# Altium PCB PCB2.PcbDoc (part 2 of 2)
Units mil, origin at the board's own origin, x right, y up, seen from the top; angles counter-clockwise.
Board outline 5560 x 2585 mil, 4 copper layers (L1, L2, L3, L4), stack 23.756 mil thick; 155 components, 55 nets, 355 pads, 375 vias.
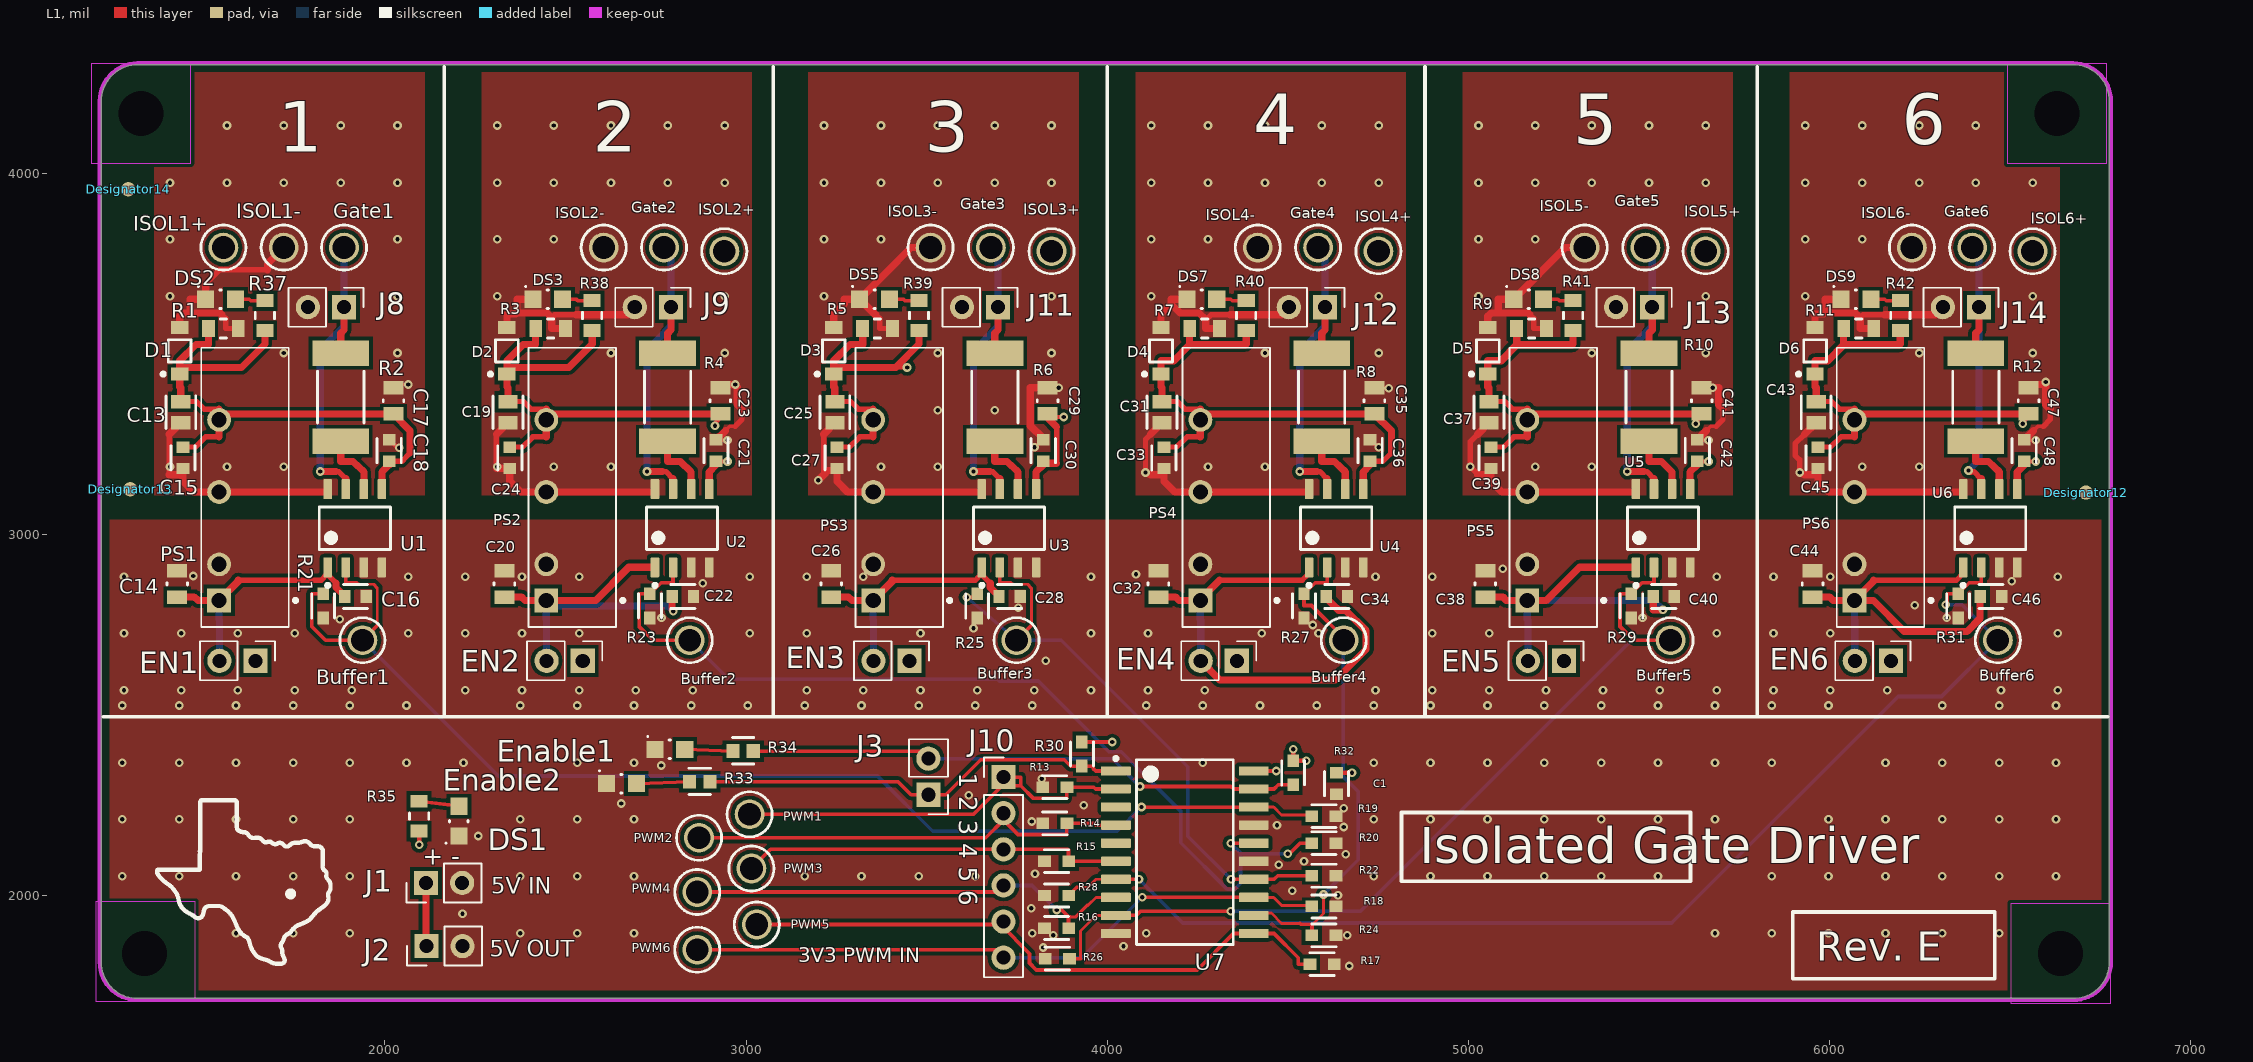
[diagram p0: L1 view]

## Via types
v1: diameter 24, hole 12, L1 to L4, 375 vias

## Nets (pads, with @x,y where several pads share a name; then routed paths per layer and width w, separated by ;. In a path a pad name is that pad's centre, name@x,y a point inside that pad or via, vN(x,y) a via of type N, cw(c..) or ccw(c..) an arc to the next point about the centre after c; other vN are vias at no path point) (continued)
NetC44_1: (continued)
  L1 w15: 6122,2873 6351,2873 U6.1@6370,2892
  L1 w20: C44.1@5953,2827 6000,2827 6010,2817 PS6.1@6069,2817 ; 6122,2873 6122,2870 PS6.1@6069,2817 ; U6.1@6370,2892 U6.1@6370,2909 ; C46.1@6417,2828 6417,2768 6381,2731 6207,2731 6122,2817 PS6.1@6069,2817
  L4 w20: PS6.1@6069,2817 6069,2764 6070,2763 EN6.2
NetDS1_2: DS1.2 R35.2 | length 110.8
  L1 w10: R35.2@2095,2261 DS1.2@2205,2248
NetDS2_2: DS2.2 R37.2 | length 82.7
  L1 w10: DS2.2@1587,3651 1625,3651 1629,3647 R37.2@1668,3647
NetDS3_2: DS3.2 R38.2 | length 84
  L1 w10: DS3.2@2492,3651 2531,3651 2534,3647 R38.2@2574,3647
NetDS4_2: Enable1.2 R34.2 | length 134.1
  L1 w10: Enable1.2@2830,2405 R34.2@2964,2400
NetDS5_2: DS5.2 R39.2 | length 82.7
  L1 w10: DS5.2@3398,3651 3436,3651 3440,3647 R39.2@3479,3647
NetDS6_2: Enable2.2 R33.2 | length 148.1
  L1 w10: Enable2.2@2696,2310 R33.2@2844,2315
NetDS7_2: DS7.2 R40.2 | length 83.7
  L1 w10: DS7.2@4303,3651 4342,3651 4346,3647 R40.2@4385,3647
NetDS8_2: DS8.2 R41.2 | length 82.7
  L1 w10: DS8.2@5209,3651 5248,3651 5252,3647 R41.2@5290,3647
NetDS9_2: DS9.2 R42.2 | length 83.7
  L1 w10: DS9.2@6114,3651 6153,3651 6157,3647 R42.2@6196,3647
NetR2_1: R2.1 U1.6 | length 179.7
  L1 w20: R2.1 1878,3202 1912,3202 1942,3173 U1.6@1942,3125
NetR4_1: R4.1 U2.6 | length 180.7
  L1 w20: R4.1 2783,3202 2818,3202 2848,3173 U2.6@2848,3125
NetR6_1: R6.1 U3.6 | length 179.7
  L1 w20: R6.1 3689,3202 3723,3202 3753,3173 U3.6@3753,3125
NetR8_1: R8.1 U4.6 | length 180.7
  L1 w20: R8.1 4594,3202 4629,3202 4659,3173 U4.6@4659,3125
NetR10_1: R10.1 U5.6 | length 180
  L1 w20: R10.1 5500,3202 5535,3202 5564,3173 U5.6@5564,3125
NetR12_1: R12.1 U6.6 | length 180.7
  L1 w20: R12.1 6405,3202 6440,3202 6470,3173 U6.6@6470,3125
PWM1: J10.1 PWM1.1 R13.1 U7.2 | length 1166.3
  L1 w10: PWM1.1 3630,2225 3709,2304 3761,2304 ; J10.1 3761,2328 3761,2304 ; U7.2@4024,2295 3968,2295 3963,2300 3888,2300 3888,2269 3796,2269 3761,2304
PWM2: J10.2 PWM2.1 R14.1 U7.4 | length 1242.9
  L1 w10: PWM2.1 3664,2160 J10.2@3713,2209 ; J10.2 J10.2@3713,2209 ; U7.4@4024,2195 3968,2195 3963,2200 3888,2200 3888,2169 3753,2169 J10.2@3713,2209
PWM3: J10.3 PWM3.1 R15.1 U7.6 | length 1062.8
  L1 w10: PWM3.1 3068,2128 J10.3 3891,2128 3893,2126 3893,2095 U7.6@4024,2095
PWM4: J10.4 PWM4.1 R16.1 U7.8 | length 1255.9
  L1 w8: 3897,1941 3913,1941 ; 3945,1973 3947,1973 3969,1995 U7.8@4024,1995
  L1 w10: PWM4.1 3695,2010 J10.4 ; v1(3860,1960) 3874,1960 3893,1941 ; R16.1@3893,1910 3893,1941 ; 3897,1941 3893,1941 ; 3913,1941 3945,1973
  L4 w10: J10.4 3792,2028 v1(3860,1960)
PWM5: J10.5 PWM5.1 R17.1 U7.11 | length 1698.6
  L1 w10: PWM5.1 J10.5@3705,1920 ; J10.5 J10.5@3705,1920 ; R17.1@4562,1810 4529,1810 4529,1828 4462,1895 4406,1895 4350,1895 4249,1794 3804,1794 3785,1813 3785,1839 J10.5@3705,1920
PWM6: J10.6 PWM6.1 R18.1 U7.13 | length 1792.4
  L1 w8: U7.13@4406,1995 4461,1995 4483,1973 R18.1@4567,1973
  L1 w10: PWM6.1 3691,1850 J10.6 ; v1(4097,1995) U7.13@4406,1995 ; R18.1@4567,1970 R18.1@4567,1973
  L4 w10: J10.6 3930,1828 v1(4097,1995)
pads on no net: Designator12.1 Designator12.15 Designator13.1 Designator13.15 Designator14.1 Designator14.15 U7.3 U7.5

## Polygon pours and split planes (outlines as drawn)
DGND on L1 "tga" (solid, remove dead copper, pour order 24): 1238,1738 6752,1738 6752,3041 1238,3041
ISOL2- on L1 "L1-ISOL2-" (solid, pour order 4): 2268,3108 3016,3108 3016,4280 2268,4280
ISOL3- on L1 "L1-ISOL3-" (solid, pour order 8): 3173,3108 3921,3108 3921,4280 3173,4280
ISOL1- on L1 "L1-ISOL1-" (solid, pour order 0): 1362,3108 2110,3108 2110,4280 1362,4280
ISOL6- on L1 "L1-ISOL6-" (solid, pour order 20): 5890,3108 6638,3108 6638,4280 5890,4280
ISOL5- on L1 "L1-ISOL5-" (solid, pour order 16): 4984,3108 5732,3108 5732,4280 4984,4280
ISOL4- on L1 "L1-ISOL4-" (solid, pour order 12): 4079,3108 4827,3108 4827,4280 4079,4280
DGND on L3 "L3-DGND" (solid, pour order 26): 1238,1738 6752,1738 6752,3041 1238,3041
ISOL2- on L3 "L3-ISOL2-" (solid, pour order 5): 2268,3108 3016,3108 3016,4280 2268,4280
ISOL3- on L3 "L3-ISOL3-" (solid, pour order 9): 3173,3108 3921,3108 3921,4280 3173,4280
ISOL1- on L3 "L3-ISOL1-" (solid, pour order 1): 1362,3108 2110,3108 2110,4280 1362,4280
ISOL6- on L3 "L3-ISOL6-" (solid, pour order 21): 5890,3108 6638,3108 6638,4280 5890,4280
ISOL5- on L3 "L3-ISOL5-" (solid, pour order 17): 4984,3108 5732,3108 5732,4280 4984,4280
ISOL4- on L3 "L3-ISOL4-" (solid, pour order 13): 4079,3108 4827,3108 4827,4280 4079,4280
DGND on L4 "L4-DGND" (solid, pour order 27): 1238,1738 6752,1738 6752,3041 1238,3041
ISOL2- on L4 "L4-ISOL2-" (solid, pour order 6): 2268,3108 3016,3108 3016,4280 2268,4280
ISOL3- on L4 "L4-ISOL3-" (solid, pour order 10): 3173,3108 3921,3108 3921,4280 3173,4280
ISOL1- on L4 "L4-ISOL1-" (solid, pour order 2): 1362,3108 2110,3108 2110,4280 1362,4280
ISOL6- on L4 "L4-ISOL6-" (solid, pour order 22): 5890,3108 6638,3108 6638,4280 5890,4280
ISOL5- on L4 "L4-ISOL5-" (solid, pour order 18): 4984,3108 5732,3108 5732,4280 4984,4280
ISOL4- on L4 "L4-ISOL4-" (solid, pour order 14): 4079,3108 4827,3108 4827,4280 4079,4280
5V on L2 "L2-5V" (solid, pour order 25): 1238,1738 6752,1738 6752,3041 1238,3041
ISOL4+ on L2 "L2-ISOL4+" (solid, pour order 15): 4079,3108 4827,3108 4827,4280 4079,4280
ISOL1+ on L2 "L2-ISOL1+" (solid, pour order 3): 1362,3108 2110,3108 2110,4280 1362,4280
ISOL2+ on L2 "L2-ISOL2+" (solid, pour order 7): 2268,3108 3016,3108 3016,4280 2268,4280
ISOL5+ on L2 "L2-ISOL5+" (solid, pour order 19): 4984,3108 5732,3108 5732,4280 4984,4280
ISOL6+ on L2 "L2-ISOL6+" (solid, pour order 23): 5890,3108 6638,3108 6638,4280 5890,4280
ISOL3+ on L2 "L2-ISOL3+" (solid, pour order 11): 3173,3108 3921,3108 3921,4280 3173,4280

## Keep-outs
Keep-Out Layer:
  region: 6492,4303 6492,4027 6768,4027 6768,4303
  region: 1187,4303 1187,4027 1463,4027 1463,4303
  region: 6502,1978 6502,1702 6778,1702 6778,1978
  region: 1199,1983 1199,1707 1475,1707 1475,1983
  lines w10: 1210,1815 ccw(c1315,1815) 1315,1710 6675,1710 ccw(c6675,1815) 6780,1815 6780,4200 ccw(c6675,4200) 6675,4305 1315,4305 ccw(c1315,4200) 1210,4200 1210,1815

## Silkscreen, mask and mechanical layers (free items; w line width, h text height)
Top Overlay:
  drawing of 16 lines, arcs and shapes, not listed
  text "4" at 4405,4080 h140
  text "5" at 5290,4080 h140
  text "6" at 6200,4080 h140
  text "1" at 1705,4060 h140
  text "2" at 2575,4060 h140
  text "3" at 3495,4060 h140
  text "1 2 3 4 5 6" at 3590,2340 h50 r270
  text "Isolated Gate Driver" at 4865,2090 h100
  text "+ -" at 2105,2085 h50
  text "5V IN" at 2295,2005 h45
  text "5V OUT" at 2290,1830 h45
  text "Rev. E" at 5962.72,1819.58 h80
  text "3V3 PWM IN" at 3145,1815 h40
Bottom Overlay:
  text "Designed by Darsh Patel" at 5800,1804.99 h60